# Altium PCB ball_dropper_rev2.PcbDoc (part 1 of 2)
Units mil, origin at the board's own origin, x right, y up, seen from the top; angles counter-clockwise.
Board outline 6000 x 4000 mil, 2 copper layers (Top Layer, Bottom Layer); 94 components, 89 nets, 479 pads, 374 vias.
Unrouted connection lines stored in the file: 4.
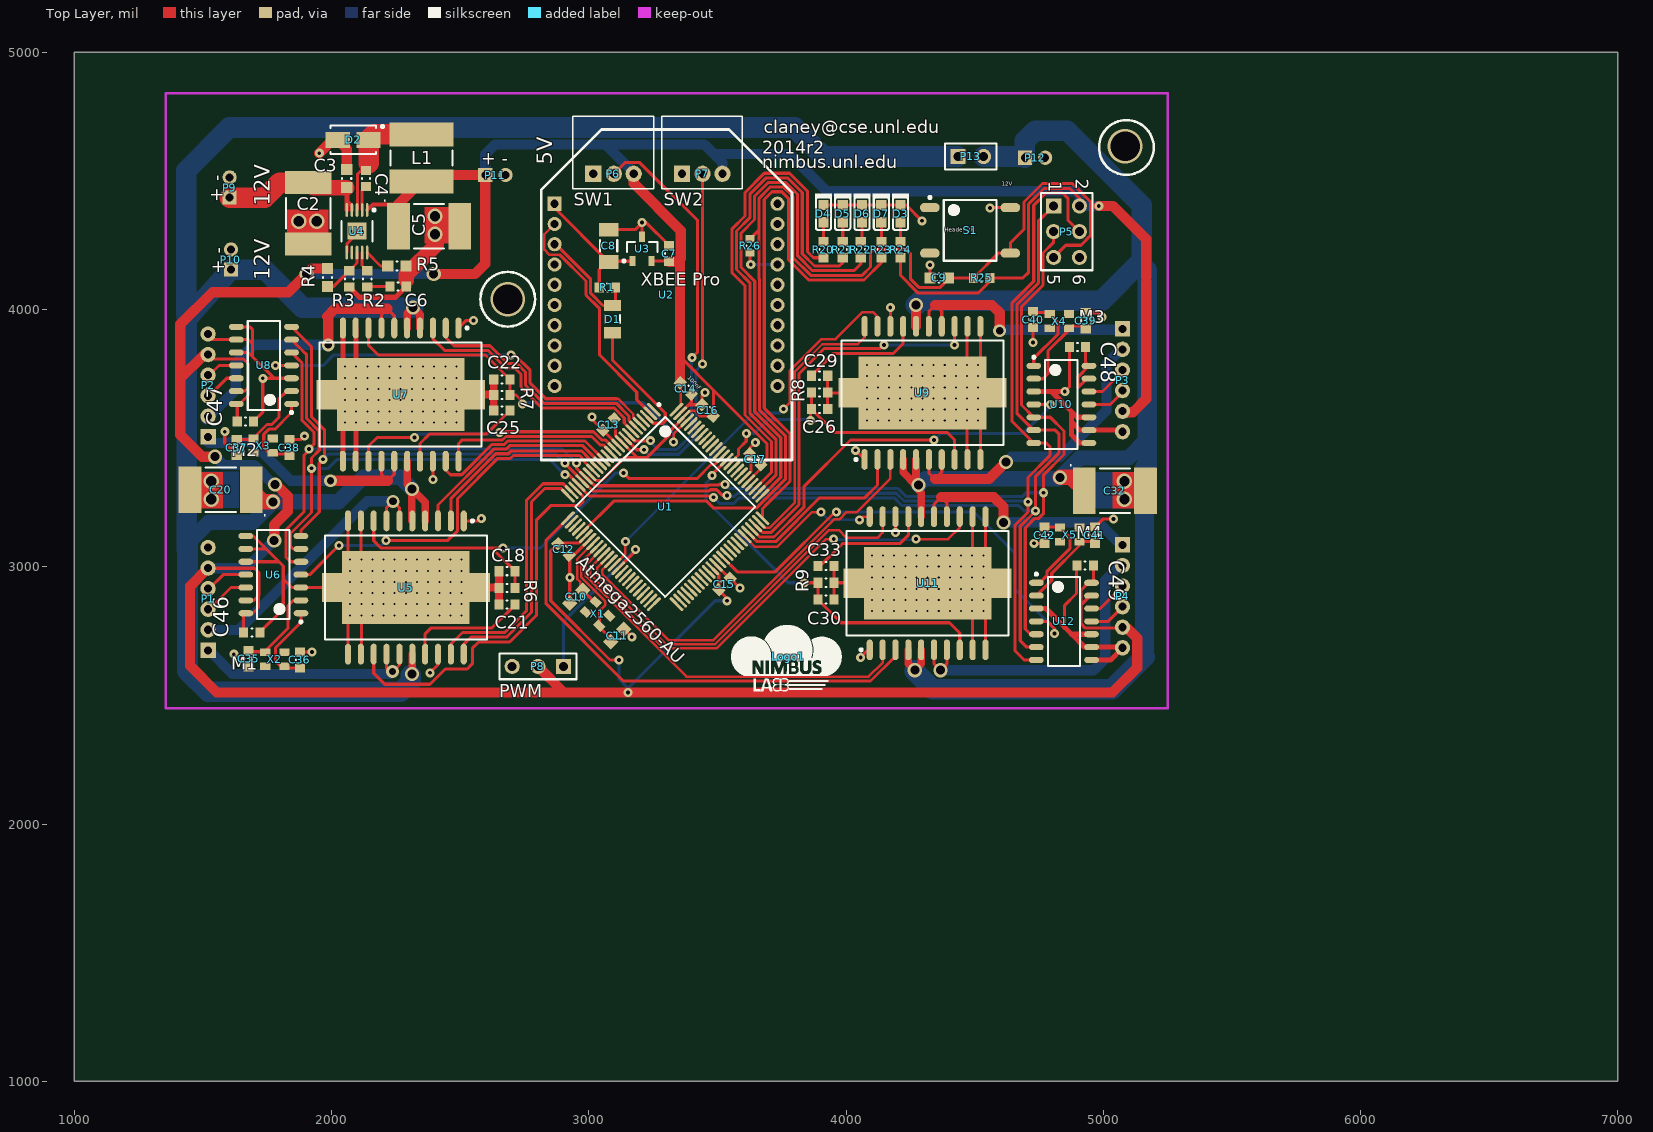
[diagram p0: Top Layer view]
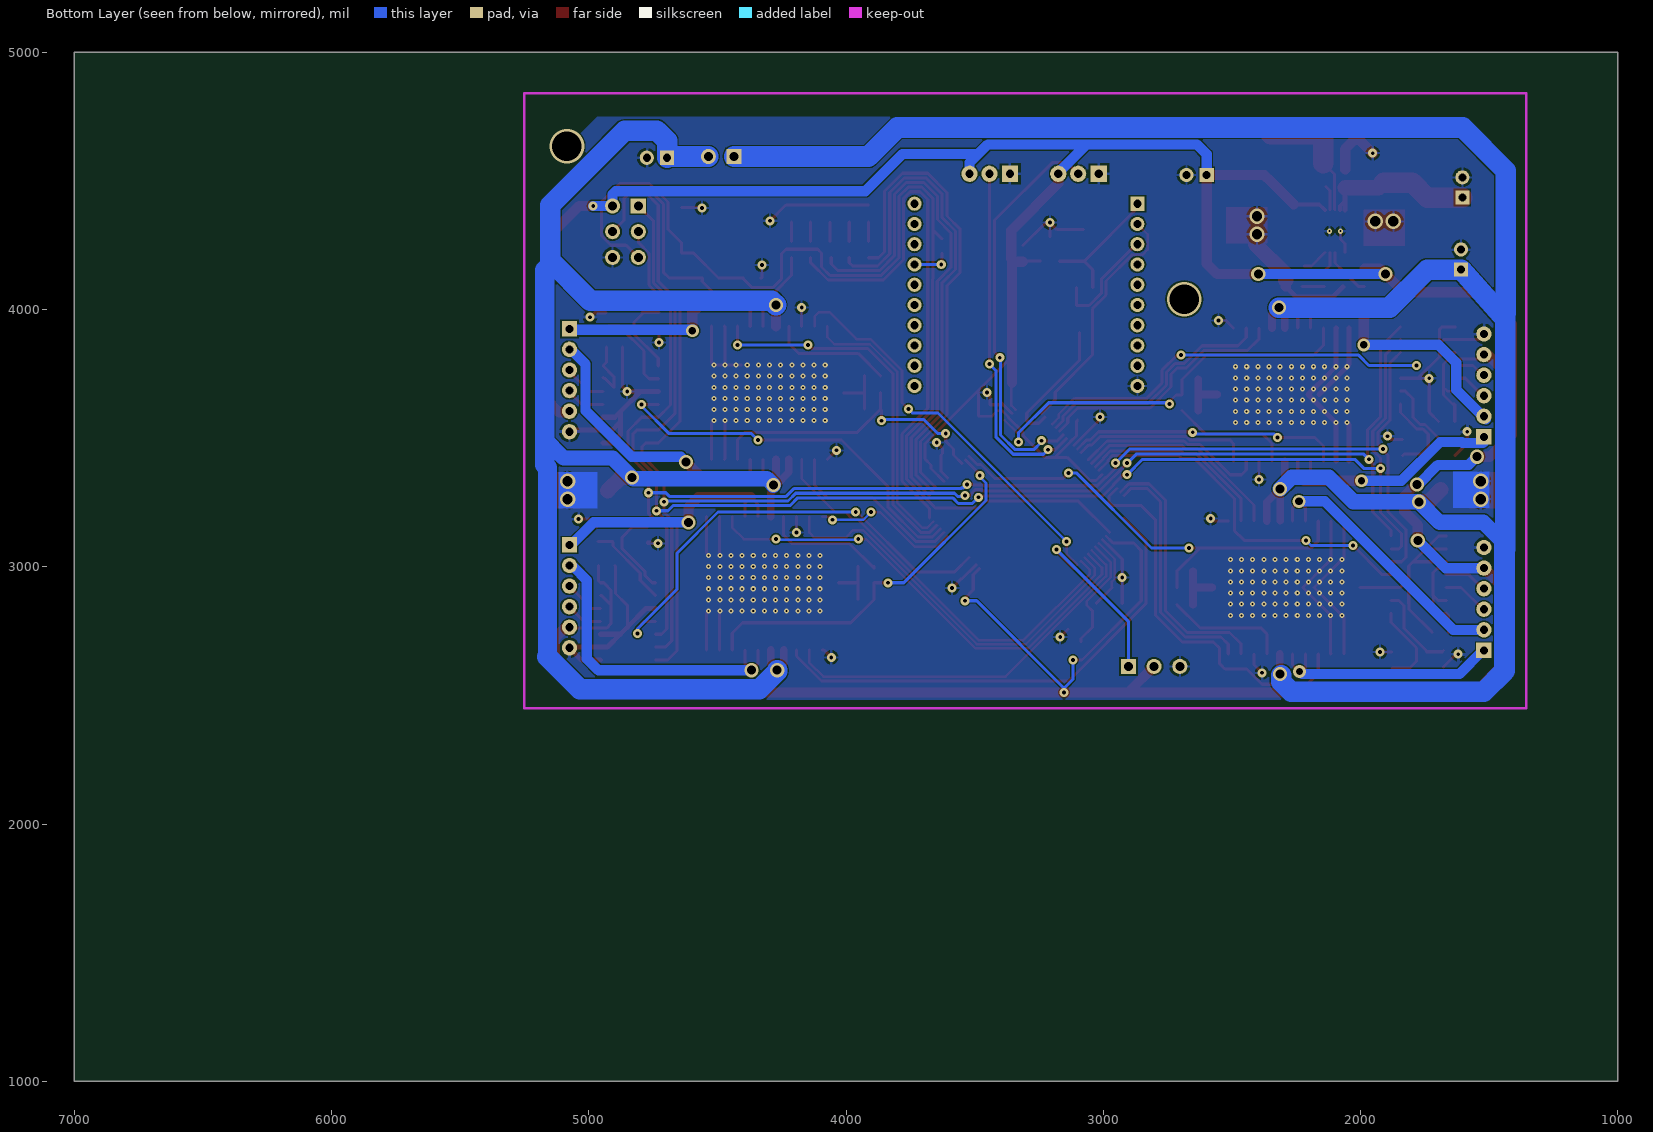
[diagram p1: Bottom Layer view, seen from below]

## Layer stack, top to bottom
Top Solder: solder mask 0.4, Solder Resist, Dk 3.5
Top Layer: signal copper 1.4
Dielectric 1: dielectric 12.6, FR-4, Dk 4.8
Bottom Layer: signal copper 1.4
Bottom Solder: solder mask 0.4, Solder Resist, Dk 3.5

## Board outline
1000,1000 7000,1000 7000,5000 1000,5000

## Design rules (kind name [scope] priority, off if disabled: settings)
Clearance Clearance_1 [All] p1: gap=6
PlaneConnect [All] p1: planeconnectstyle=Direct reliefexpansion=20 reliefentries=4 reliefconductorwidth=10 reliefairgap=10
PolygonConnect GNDConnect [InNet('GND') vs OnLayer('Top Layer')] p1: connectstyle=Direct reliefconductorwidth=10 reliefentries=4 polygonreliefangle="90 Angle" airgapwidth=10
PolygonConnect HBridgeConnect [(InComponent('U5') OR InComponent('U7') OR InComponent('U9') OR InComponent('U11'))] p2: connectstyle=Direct reliefconductorwidth=10 reliefentries=4 polygonreliefangle="90 Angle" airgapwidth=10
PolygonConnect PolygonConnect_1 [All] p3: connectstyle=Relief reliefconductorwidth=10 reliefentries=4 polygonreliefangle="90 Angle" airgapwidth=10
RoutingVias [All] p1: holewidth=15 width=35 viastyle="Through Hole" minholewidth=15 minwidth=35 maxholewidth=80 maxwidth=100
SolderMaskExpansion [All] p1: expansion=4
UnpouredPolygon [All] p1: allowunpoured=FALSE
Width [All] p1: maxlimit=100 minlimit=10 preferedwidth=12
28 further rules are at their usual default settings.

## Components (designator, comment, footprint, x,y, rotation, side; value= is the part's Value field where it differs from the comment)
C2 "100uF" TantalumCap7343 1908.96,4374.38 r270 top
C3 "10uF" CAPC0603(1608)100_M 2058.96,4509.38 r270 top
C4 "470nF" CAPC0603(1608)100_N 2133.96,4509.38 r90 top
C5 "47uF" TantalumCap7343 2378.96,4324.38 r0 top
C6 "470pF" CAPC0603(1608)100_N 2258.96,4089.38 r180 top
C7 "C470nF" CAPC0603(1608)100_N 3312.27,4217.73 r270 top
C8 "33uF" CAPC1206(3216)190_M 3077.27,4247.73 r270 top
C9 "10nF" CAPC0603(1608)100_M 4362.35,4122.73 r0 top
C10 "22pF" CAPC0603(1608)100_M 2951.21,2882.73 r45 top
C11 "22pF" CAPC0603(1608)100_M 3111.21,2732.73 r225 top
C12 "100nF" CAPC0603(1608)100_N 2902.27,3067.73 r135 top
C13 "100nF" CAPC0603(1608)100_N 3077.27,3552.73 r45 top
C14 "100nF" CAPC0603(1608)100_N 3377.27,3692.73 r135 top
C15 "100nF" CAPC0603(1608)100_N 3527.27,2932.73 r45 top
C16 "100nF" CAPC0603(1608)100_N 3462.27,3607.73 r315 top
C17 "100nF" CAPC0603(1608)100_N 3647.27,3417.73 r315 top
C18 "1uF" CAPC0603(1608)100_N 2682.27,2982.73 r0 top
C20 "47uF" TantalumCap7343 1568.96,3299.38 r180 top
C21 "33nF" CAPC0603(1608)100_N 2682.27,2852.73 r0 top
C22 "1uF" CAPC0603(1608)100_N 2662.27,3727.73 r0 top
C25 "33nF" CAPC0603(1608)100_N 2662.27,3607.73 r0 top
C26 "1uF" CAPC0603(1608)100_N 3897.35,3612.73 r180 top
C29 "33nF" CAPC0603(1608)100_N 3897.35,3742.73 r180 top
C30 "1uF" CAPC0603(1608)100_N 3922.27,2872.73 r180 top
C32 "47uF" TantalumCap7343 5045.58,3296.04 r0 top
C33 "33nF" CAPC0603(1608)100_N 3922.27,3002.73 r180 top
C35 "8.2pF" CAPC0603(1608)100_N 1677.27,2642.73 r270 top
C36 "8.2pF" CAPC0603(1608)100_N 1877.27,2637.73 r90 top
C37 "8.2pF" CAPC0603(1608)100_N 1631.5,3463.5 r270 top
C38 "8.2pF" CAPC0603(1608)100_N 1836.5,3463.5 r90 top
C39 "8.2pF" CAPC0603(1608)100_N 4932.27,3956.08 r90 top
C40 "8.2pF" CAPC0603(1608)100_N 4727.27,3961.08 r270 top
C41 "8.2pF" CAPC0603(1608)100_N 4967.35,3122.73 r90 top
C42 "8.2pF" CAPC0603(1608)100_N 4772.35,3122.73 r270 top
C46 "100nF" CAPC0603(1608)100_N 1690,2745 r180 top
C47 "100nF" CAPC0603(1608)100_N 1665,3565 r180 top
C48 "100nF" CAPC0603(1608)100_N 4900,3855 r0 top
C49 "100nF" CAPC0603(1608)100_N 4930,3005 r0 top
D1 "diode_MBRA210LT3G" C1206 3092.27,3962.73 r270 top
D2 "diode_B340A" diode_B340A 2083.96,4659.38 r0 top
D3 "APG1608SEKC/T" KING-LED0603-25-ORANGE_V 4212.27,4372.73 r270 top
D4 "APG1608SEKC/T" KING-LED0603-25-ORANGE_V 3912.27,4372.73 r270 top
D5 "APG1608SEKC/T" KING-LED0603-25-ORANGE_V 3987.27,4372.73 r270 top
D6 "APG1608SEKC/T" KING-LED0603-25-ORANGE_V 4062.27,4372.73 r270 top
D7 "APG1608SEKC/T" KING-LED0603-25-ORANGE_V 4137.27,4372.73 r270 top
L1 "6.3uH" TYS6045 2348.96,4589.38 r90 top
Logo1 "NimbusLogo" "NIMBUS Logo" 3775,2650 r0 top
P1 "M1" DF3A-6P-2DS 1520,2875 r90 top
P2 "M2" DF3A-6P-2DS 1520,3705 r90 top
P3 "M3" DF3A-6P-2DS 5075,3725 r270 top
P4 "M4" DF3A-6P-2DS 5075,2885 r270 top
P5 "ISP" HDR2X3 4807.35,4402.73 r270 top
P6 "SW1" DF3A-3P-2DS 3097.27,4527.73 r0 top
P7 "SW2" DF3A-3P-2DS 3442.27,4527.73 r0 top
P8 "PWM" HDR1X3 2902.27,2612.73 r180 top
P9 "12V" DF3A-2P-2DS 1603.96,4474.38 r90 top
P10 "12V" DF3A-2P-2DS 1608.96,4194.38 r90 top
P11 "5V" DF3A-2P-2DS 2637.27,4522.73 r0 top
P12 "12V" DF3A-2P-2DS 4735,4590 r0 top
P13 "Header 2H" HDR1X2 4435,4595 r0 top
R1 "10K" RESC0603(1608)_N 3072.27,4085.72 r180 top
R2 "16.2K" RESC0603(1608)_N 2138.96,4119.38 r90 top
R3 "100K" RESC0603(1608)_N 2068.96,4119.38 r90 top
R4 "536K" RESC0603(1608)_M 1983.96,4124.38 r90 top
R5 "40.2K" RESC0603(1608)_M 2253.96,4169.38 r0 top
R6 "100R" RESC0603(1608)_N 2682.27,2917.73 r0 top
R7 "100R" RESC0603(1608)_N 2662.27,3667.73 r0 top
R8 "100R" RESC0603(1608)_N 3897.35,3677.73 r180 top
R9 "100R" RESC0603(1608)_N 3922.27,2937.73 r180 top
R20 "330R" RESC0603(1608)_N 3912.35,4232.73 r90 top
R21 "330R" RESC0603(1608)_N 3987.35,4232.73 r90 top
R22 "330R" RESC0603(1608)_N 4057.27,4232.73 r90 top
R23 "330R" RESC0603(1608)_N 4137.35,4232.73 r90 top
R24 "330R" RESC0603(1608)_N 4212.35,4232.73 r90 top
R25 "4.7K" RESC0603(1608)_N 4527.35,4122.73 r0 top
R26 "Jumper 0603(1608)" RESC0603(1608)_L 3627.27,4247.73 r90 top
S1 "TactileSwitch" TactileSwitch 4482.35,4307.73 r0 top
U1 "Atmega2560-AU" TSQFP50P1600X1600X160-100N 3297.27,3232.73 r315 top
U2 "XBEE Pro" "XBEE PRO" 2867.27,3702.73 r0 top
U3 "LM3480" LM3480 3207.27,4235.72 r90 top
U4 "LT3480" LT-MSE-10-EDP_L 2098.96,4304.38 r270 top
U5 "MC33887" MC33887 2288.96,2919.38 r270 top
U6 "LFLS7366R-TS" TSOP127P600X135-14N 1773.96,2969.38 r180 top
U7 "MC33887" MC33887 2268.96,3669.38 r270 top
U8 "LFLS7366R-TS" TSOP127P600X135-14N 1737.27,3782.73 r180 top
U9 "MC33887" MC33887 4297.27,3676.08 r90 top
U10 "LFLS7366R-TS" TSOP127P600X135-14N 4837.27,3631.08 r0 top
U11 "MC33887" MC33887 4317.27,2936.08 r90 top
U12 "LFLS7366R-TS" TSOP127P600X135-14N 4847.35,2787.73 r0 top
X1 "20MHz" xtal4 2956.21,2827.73 r315 top
X2 "40MHz" xtal4 1717.27,2592.73 r0 top
X3 "40MHz" xtal4 1671.5,3423.5 r0 top
X4 "40MHz" xtal4 4892.27,4002.73 r180 top
X5 "40MHz" xtal4 4932.27,3172.73 r180 top

## Footprints (in the part's own frame and the unit in brackets; to place one, negate y for a bottom-side part, rotate by r counter-clockwise, add the part's x,y. Pads: shape width x height; smd on the part's side, far side on the other; paste and mask are expansions set on the pad)
C1206 [mm] "Chip Capacitor, Body 3.2x1.6mm, IPC High Density"
  rect 1.1x1.7 smd: 1(-1.35,0) 2(1.35,0)
  silkscreen extent -0.4,-0.75 0.4,0.75, body extent -1.7,-0.9 1.7,0.9, height 1.3
CAPC0603(1608)100_M [mm] "Chip Capacitor, Body 1.6x0.8mm, Height 1.0mm, IPC Low Density"
  rect 1.1x1.1 smd: 1(-0.9,0) 2(0.9,0)
  silkscreen extent -0.05,-0.45 0.05,0.45, body extent -0.87,-0.47 0.88,0.48, height 1
CAPC0603(1608)100_N [mm] "Chip Capacitor, Body 1.6x0.8mm, Height 1.0mm, IPC Medium Density"
  rect 0.9x1 smd: 1(-0.8,0) 2(0.8,0)
  silkscreen extent -0.05,-0.4 0.05,0.4, body extent -0.87,-0.48 0.88,0.47, height 1
CAPC1206(3216)190_M [mm] "Chip Capacitor, Body 3.2x1.6mm, Height 1.9mm, IPC Low Density"
  rect 1.35x1.9 smd: 1(-1.6,0) 2(1.6,0)
  silkscreen extent -0.55,-0.85 0.55,0.85, body extent -1.7,-0.9 1.7,0.9, height 1.9
DF3A-2P-2DS [mm] "Two terminal, Right Angle Connector"
  rect 1.4x1.4 hole 0.8: 1(-1,0)
  round 1.4 hole 0.8: 2(1,0)
  body extent -3.05,-1.5 3.05,5.7, height 5
DF3A-3P-2DS [mm]
  rect 1.6x1.6 hole 0.8: 1(-2.032,0)
  round 1.6 hole 0.8: 2(0,0) 3(1.968,0)
  silkscreen extent -4.03,-1.5 3.94,5.7
DF3A-6P-2DS [mil]
  rect 60x60 hole 31.5: 1(-200,0)
  round 60 hole 31.5: 2(-120,0) 3(-40,0) 4(40,0) 5(120,0) 6(200,0)
  body extent -275,-75 277,150, height 197
diode_B340A [mm] "Molded Diode, 2-Leads, Body 4.25x2.68mm, IPC Medium Density"
  rect 2.4x1.55 smd: 1(-1.525,0) 2(1.525,0)
  silkscreen extent -2.25,-1.4 3.03,1.45, body extent -2.25,-1.4 2.25,1.39, height 2.29
HDR1X2 [mm] "Connector; Header; 2 Position"
  rect 1.5x1.5 hole 0.9: 1(0,0)
  round 1.5 hole 0.9: 2(2.54,0)
  silkscreen extent -1.27,-1.27 3.81,1.27
HDR1X3 [mm] "Connector; Header; 3 Position"
  rect 1.5x1.5 hole 0.9: 1(0,0)
  round 1.5 hole 0.9: 2(2.54,0) 3(5.08,0)
  silkscreen extent -1.27,-1.27 6.35,1.27
HDR2X3 [mm] "Connector; Header; 3x2 Position"
  rect 1.5x1.5 hole 0.9: 1(0,0)
  round 1.5 hole 0.9: 2(0,2.54) 3(2.54,0) 4(2.54,2.54) 5(5.08,0) 6(5.08,2.54)
  silkscreen extent -1.27,-1.27 6.35,3.81
KING-LED0603-25-ORANGE_V [mm] "LED, SMT, Body 1.6 x 0.8 mm, 0.25mm Thickness"
  rect 1x1 smd paste+0 mask+0: 1(0.85,0) 2(-0.85,0)
  silkscreen extent -1.97,-0.85 1.6,0.85, body extent -0.8,-0.4 0.8,0.4, height 0.25
LM3480 [mm] "SOT23, 3-Leads, Body 2.92x2.37mm, Pitch 0.95mm, IPC Medium Density"
  rect 1x0.6 smd: 1(-1.2,0.95) 2(-1.2,-0.95) 3(1.2,0)
  silkscreen extent -1.32,-1.5 0.7,1.92, body extent -0.7,-1.52 0.7,1.52, height 1.12
LT-MSE-10-EDP_L [mm] "SOP, 10-Leads, Body 3.1x3.1mm, Pitch 0.5mm, Thermal Pad 1.88x1.68mm, IPC High Density"
  oval 1.35x0.25 smd mask+0.082: 1(-2.1,1) 2(-2.1,0.5) 3(-2.1,0) 4(-2.1,-0.5) 5(-2.1,-1) 6(2.1,-1) 7(2.1,-0.5) 8(2.1,0) 9(2.1,0.5) 10(2.1,1)
  rect 1.68x1.88 smd mask+0.082: 11(0,0)
  silkscreen extent -2.22,-1.55 1.02,1.8, body extent -1.55,-1.55 1.55,1.55, height 1.1
MC33887 [mm] "SOP, 20-Leads, Body 15.90x11.00mm, Pitch 1.27mm, Thermal Pad 12.60x7.20mm, IPC Medium Density"
  oval 2.05x0.6 smd: 1(-6.575,5.715) 2(-6.575,4.445) 3(-6.575,3.175) 4(-6.575,1.905) 5(-6.575,0.635) 6(-6.575,-0.635) 7(-6.575,-1.905) 8(-6.575,-3.175) 9(-6.575,-4.445) 10(-6.575,-5.715) 11(6.575,-5.715) 12(6.575,-4.445) 13(6.575,-3.175) 14(6.575,-1.905) 15(6.575,-0.635) 16(6.575,0.635) 17(6.575,1.905) 18(6.575,3.175) 19(6.575,4.445) 20(6.575,5.715)
  rect 2.9x2 smd: 21(0,7.3) 21(0,-7.3)
  rect 7.2x12.6 smd: 21(0,0)
  silkscreen extent -6.7,-8 5.15,8, body extent -5.55,-8 5.55,8, height 3.4
"NIMBUS Logo" [mil] "NIMBUS Logo Silkscreen"
  silkscreen extent -222,-134 208,123
RESC0603(1608)_L [mm] "Chip Resistor, Body 1.6x0.8mm, IPC High Density"
  rect 0.7x0.9 smd: 1(-0.7,0) 2(0.7,0)
  silkscreen extent -0.05,-0.35 0.05,0.35, body extent -0.85,-0.47 0.85,0.47, height 0.6
RESC0603(1608)_M [mm] "Chip Resistor, Body 1.6x0.8mm, IPC Low Density"
  rect 1.1x1.1 smd: 1(-0.9,0) 2(0.9,0)
  silkscreen extent -0.05,-0.45 0.05,0.45, body extent -0.85,-0.47 0.85,0.47, height 0.6
RESC0603(1608)_N [mm] "Chip Resistor, Body 1.6x0.8mm, IPC Medium Density"
  rect 0.9x1 smd: 1(-0.8,0) 2(0.8,0)
  silkscreen extent -0.05,-0.4 0.05,0.4, body extent -0.85,-0.47 0.85,0.47, height 0.6
TactileSwitch [mm] "SOP, 4-Leads, Body 6.00x6.00mm, Pitch 4.50mm, IPC Medium Density"
  oval 1.95x0.9 smd: 1(-3.975,2.25) 2(-3.975,-2.25) 3(3.975,-2.25) 4(3.975,2.25)
  silkscreen extent -4.1,-3 2.6,3.37, body extent -3,-3 3,3, height 4.4
TantalumCap7343 [mm]
  rect 2.25x4.6 smd: 1(-3.025,0) 2(3.025,0)
  silkscreen extent -4.41,-2.2 1.5,2.56, body extent -3.8,-2.3 3.8,2.3, height 1.5
TSOP127P600X135-14N [mm] "TSOP, 14-Leads, Body 8.65x3.90mm, Pitch 1.27mm, IPC Medium Density"
  oval 1.45x0.6 smd: 1(-2.725,3.81) 2(-2.725,2.54) 3(-2.725,1.27) 4(-2.725,0) 5(-2.725,-1.27) 6(-2.725,-2.54) 7(-2.725,-3.81) 8(2.725,-3.81) 9(2.725,-2.54) 10(2.725,-1.27) 11(2.725,0) 12(2.725,1.27) 13(2.725,2.54) 14(2.725,3.81)
  silkscreen extent -2.85,-4.4 1.6,4.78, body extent -2,-4.4 2,4.4, height 1.75
TSQFP50P1600X1600X160-100N [mm] "TSQFP, 100-Leads, Body 14.00x14.00mm, Pitch 0.50mm, IPC Medium Density"
  oval 1.8x0.3 smd: 1(-7.575,6) 2(-7.575,5.5) 3(-7.575,5) 4(-7.575,4.5) 5(-7.575,4) 6(-7.575,3.5) 7(-7.575,3) 8(-7.575,2.5) 9(-7.575,2) 10(-7.575,1.5) 11(-7.575,1) 12(-7.575,0.5) 13(-7.575,0) 14(-7.575,-0.5) 15(-7.575,-1) 16(-7.575,-1.5) 17(-7.575,-2) 18(-7.575,-2.5) 19(-7.575,-3) 20(-7.575,-3.5) 21(-7.575,-4) 22(-7.575,-4.5) 23(-7.575,-5) 24(-7.575,-5.5) 25(-7.575,-6) 51(7.575,-6) 52(7.575,-5.5) 53(7.575,-5) 54(7.575,-4.5) 55(7.575,-4) 56(7.575,-3.5) 57(7.575,-3) 58(7.575,-2.5) 59(7.575,-2) 60(7.575,-1.5) 61(7.575,-1) 62(7.575,-0.5) 63(7.575,0) 64(7.575,0.5) 65(7.575,1) 66(7.575,1.5) 67(7.575,2) 68(7.575,2.5) 69(7.575,3) 70(7.575,3.5) 71(7.575,4) 72(7.575,4.5) 73(7.575,5) 74(7.575,5.5) 75(7.575,6)
  oval 0.3x1.8 smd: 26(-6,-7.575) 27(-5.5,-7.575) 28(-5,-7.575) 29(-4.5,-7.575) 30(-4,-7.575) 31(-3.5,-7.575) 32(-3,-7.575) 33(-2.5,-7.575) 34(-2,-7.575) 35(-1.5,-7.575) 36(-1,-7.575) 37(-0.5,-7.575) 38(0,-7.575) 39(0.5,-7.575) 40(1,-7.575) 41(1.5,-7.575) 42(2,-7.575) 43(2.5,-7.575) 44(3,-7.575) 45(3.5,-7.575) 46(4,-7.575) 47(4.5,-7.575) 48(5,-7.575) 49(5.5,-7.575) 50(6,-7.575) 76(6,7.575) 77(5.5,7.575) 78(5,7.575) 79(4.5,7.575) 80(4,7.575) 81(3.5,7.575) 82(3,7.575) 83(2.5,7.575) 84(2,7.575) 85(1.5,7.575) 86(1,7.575) 87(0.5,7.575) 88(0,7.575) 89(-0.5,7.575) 90(-1,7.575) 91(-1.5,7.575) 92(-2,7.575) 93(-2.5,7.575) 94(-3,7.575) 95(-3.5,7.575) 96(-4,7.575) 97(-4.5,7.575) 98(-5,7.575) 99(-5.5,7.575) 100(-6,7.575)
  silkscreen extent -7.7,-6.28 6.28,6.82, body extent -7,-7 7,7, height 1.6
TYS6045 [mm] "Chip Inductor, 2-Leads, Body 6.00x6.00mm, IPC Medium Density"
  rect 2.36x6.32 smd: 1(-2.32,0) 2(2.32,0)
  silkscreen extent -0.75,-3.06 0.75,3.06, body extent -3.15,-3.15 3.15,3.15, height 4.5
"XBEE PRO" [mm] "XBEE PRO"
  rect 1.4x1.4 hole 0.8: 1(0,18)
  round 1.4 hole 0.8: 2(0,16) 3(0,14) 4(0,12) 5(0,10) 6(0,8) 7(0,6) 8(0,4) 9(0,2) 10(0,0) 11(22,0) 12(22,2) 13(22,4) 14(22,6) 15(22,8) 16(22,10) 17(22,12) 18(22,14) 19(22,16) 20(22,18)
  body extent -1.19,-7.37 23.19,25.61, height 7
xtal4 [mm]
  rect 1x0.75 smd: 1(0.635,1.905) 2(2.54,0.508) 3(0.635,0.508) 4(2.54,1.905)
  Mechanical 1 keep-out lines w0.254: 0.127,0 0,0.127 0,2.413 3.048,2.413 3.175,2.286 3.175,0.127 3.048,0 0.127,0
  body extent 0.25,0.25 2.92,2.16, height 0.55

## Part data
C2 C5 C20 C32: library part TantalumCap7343
C3: library part CMP-1035-02800-1, "CAP 10uF 10V ±20% 0603 (1608 Metric) Thickness 1mm SMD"
C4: library part CMP-1035-02701-1, "CAP 470nF 16V ±20% 0603 (1608 Metric) Thickness 1mm SMD"
C6: library part CMP-1035-01664-1, "CAP 470pF 16V ±2% 0603 (1608 Metric) Thickness 1mm SMD"
C7: library part CMP-1035-02696-1, "CAP 470nF 10V ±10% 0603 (1608 Metric) Thickness 1mm SMD"
C8: library part CMP-1037-04997-1, "CAP 33uF 10V ±20% 1206 (3216 Metric) Thickness 1.9mm SMD"
C9: library part CMP-1035-02304-1, "CAP 10nF 10V ±2% 0603 (1608 Metric) Thickness 1mm SMD"
C10 C11: library part CMP-1035-00797-1, "CAP 22pF 10V ±0.25pF 0603 (1608 Metric) Thickness 1mm SMD"
C12 C13 C14 C15 C16 C17 C46 C47 C48 C49: library part CMP-1035-02582-1, "CAP 100nF 10V -20% to +80% 0603 (1608 Metric) Thickness 1mm SMD"
C18 C22 C26 C30: library part CMP-1035-02740-1, "CAP 1uF 25V ±10% 0603 (1608 Metric) Thickness 1mm SMD"
C21 C25 C29 C33: library part CMP-1035-02463-1, "CAP 33nF 25V ±5% 0603 (1608 Metric) Thickness 1mm SMD"
C35 C36 C37 C38 C39 C40 C41 C42: library part CMP-1035-00477-1, "CAP 8.2pF 10V ±0.1pF 0603 (1608 Metric) Thickness 1mm SMD"
D3 D4 D5 D6 D7: library part CMP-0239-00002-1, "LED, SMT, 0603(1608), 0.25mm Tthickness, Super Bright Orange"
L1: library part Inductor, "Inductor"
P1 P2 P3 P4: library part "Header 6", "Header, 6-Pin"
P5: library part "Header 3X2", "Header, 3-Pin, Dual row"
P6 P7: library part Hirose3
P8: library part "Header 3", "Header, 3-Pin"
P9 P10 P11 P12: library part "Header 2", "Header, 2-Pin"
P13: "Header, 2-Pin, Right Angle"
R1: library part CMP-1012-00098-1, "10K 0.1W 5% 0603 (1608 Metric)  SMD"
R2: library part CMP-1012-00645-1, "16K2 0.1W 1% 0603 (1608 Metric)  SMD"
R3: library part CMP-1012-00122-1, "100K 0.1W 5% 0603 (1608 Metric)  SMD"
R4: library part CMP-1012-00819-1, "536K 0.1W 1% 0603 (1608 Metric)  SMD"
R5: library part CMP-1012-00691-1, "40K2 0.1W 1% 0603 (1608 Metric)  SMD"
R6 R7 R8 R9: library part CMP-1012-00050-1, "100R 0.1W 5% 0603 (1608 Metric)  SMD"
R20 R21 R22 R23 R24: library part CMP-1012-00062-1, "330R 0.1W 5% 0603 (1608 Metric)  SMD"
R25: library part CMP-1012-00090-1, "4K7 0.1W 5% 0603 (1608 Metric)  SMD"
R26: library part CMP-1012-00001-1, "Jumper 0603 (1608 Metric)"
U1: "ATMEGA2560-16AURCT-ND"
U2: library part "Xbee Pro", "XBEE/XBEE Pro"
U3: "LM3480IM3-3.3/NOPBCT-ND"
U4: library part CMP-0491-01005-1, "2 A, 2.4 MHz Step-Down Switching Regulator with 70 uA Quiescent Current, 10-pin SOP (MSE-10-EDP), -40 to 85 degC, Pb-Free, Tape and Reel"
U5 U7 U9 U11: library part "33887 H Bridge", "MC33887APVWR2CT-ND"
X1 X2 X3 X4 X5: library part xtal4

## Via types
v1: diameter 19.68, hole 7.87, Top Layer to Bottom Layer, 266 vias
v2: diameter 35, hole 15, Top Layer to Bottom Layer, 70 vias
v3: diameter 55, hole 35, Top Layer to Bottom Layer, 13 vias
v4: diameter 60, hole 40, Top Layer to Bottom Layer, 8 vias
v5: diameter 35, hole 15, Top Layer to Bottom Layer, tented both sides, 7 vias
v6: diameter 50, hole 28, Top Layer to Bottom Layer, 4 vias
v7: diameter 55, hole 35, Top Layer to Bottom Layer, tented both sides, 3 vias
v8: diameter 135, hole 115, Top Layer to Bottom Layer, 2 vias
v9: diameter 50, hole 30, Top Layer to Bottom Layer, 1 vias

## Nets (pads, with @x,y where several pads share a name; then routed paths per layer and width w, separated by ;. In a path a pad name is that pad's centre, name@x,y a point inside that pad or via, vN(x,y) a via of type N, cw(c..) or ccw(c..) an arc to the next point about the centre after c; other vN are vias at no path point)
3.3V: C8.2 R1.2 U2.1 U3.1 | length 520.1
  Top Layer w12: U2.1@2867.27,4411.39 2867.27,4394.74 C8.2@3074.28,4187.73 ; R1.2@3040.78,4085.72 3040.78,4154.23 C8.2@3074.28,4187.73 ; U3.1@3169.12,4187.73 C8.2@3074.28,4187.73
5V: C5.1 C7.2 C12.2 C13.2 C14.2 C15.1 C16.2 C17.2 C46.2 C47.2 C48.2 C49.2 L1.1 P1.5 P2.5 P3.5 P4.5 P5.2 P6.3 P7.3 P8.2 P11.1 R4.2 R24.1 R25.2 U1.10 U1.19 U1.31 U1.61 U1.80 U1.98 U1.100 U3.2 U4.1 U6.13 U6.14 U8.13 U8.14 U10.13 U10.14 U12.13 U12.14 | length 19296.3
  Top Layer w10: P2.5@1502.5,3822.5 1520,3822.5 1534.77,3807.73 1657.27,3807.73 1677.27,3787.73 1677.27,3697.73 ; U8.13@1629.99,3682.73 1662.27,3682.73 1677.27,3697.73 ; U8.14@1636.13,3632.73 1642.27,3632.73 1677.27,3667.73 1677.27,3697.73 ; U6.14@1666.68,2819.38 1693.92,2819.38 1717.27,2842.73 1717.27,2887.73 ; U1.100@3341.12,3610.64 3357.27,3626.8 3357.27,3712.73 C14.2@3355,3715 ; U1.98@3368.96,3582.8 3392.82,3606.67 3410.76,3606.67 3431.97,3585.46 C16.2@3484.54,3585.46
  Top Layer w12: P1.5@1519.38,2994.38 1700.62,2994.38 1717.27,2977.73 1717.27,2887.73 1698.92,2869.38 U6.13@1666.68,2869.38 ; C47.2@1633.5,3565 1633.5,3630.1 U8.14@1636.13,3632.73 ; C46.2@1658.5,2745 1658.5,2811.21 U6.14@1666.68,2819.38 ; U1.31@2988.96,3119.29 2962.4,3092.73 2882.27,3092.73 2852.27,3062.73 2852.27,2867.73 3082.27,2637.73 v2(3117.27,2637.73) ; U1.19@3005.19,3357.91 3027.87,3335.23 3050.23,3335.23 3140.5,3425.5 3187.78,3425.5 ; C13.2@3099.54,3570 3103.28,3566.26 3103.28,3510.23 U1.10@3128.15,3485.37 3128.15,3485.13 3187.78,3425.5 ; U3.2@3244.67,4188.48 C7.2@3326.52,4188.48 ; 3355,3812.73 3358.99,3812.73 3484.54,3687.18 ; U1.98@3368.96,3580.29 3313,3524.33 3313,3511.28 3227.22,3425.5 3187.78,3425.5 ; U1.61@3480.31,2994.01 3505.18,2969.15 3505.18,2910.63 C15.1@3505,2910.46 3537.27,2878.19 v2(3537.27,2867.73) ; C16.2@3484.54,3585.46 3484.54,3687.18 ; U1.80@3619.51,3332.25 3669.54,3382.29 C17.2@3669.54,3395.46 3692.27,3418.19 3692.27,3479.45 3484.54,3687.18 ; R24.1@4212.35,4201.23 4212.35,4132.19 4279.54,4065 4515,4065 4558.85,4108.85 R25.2@4558.85,4122.73 4687.73,4122.73 4710,4145 4710,4410.83 ; 4711.89,4412.73 4769.89,4470.73 4870.27,4470.73 4907.35,4433.65 P5.2@4907.35,4402.73 ; 4914.09,2852.73 4949.09,2887.73 U12.13@4954.63,2887.73 ; C48.2@4931.5,3855 4931.5,3794.13 U10.14@4944.55,3781.08 4902.27,3738.79 4902.27,3697.73 4935.62,3731.08 4942.42,3734.88 U10.13@4944.55,3736.08 ; C49.2@4961.5,3005 4961.5,2944.59 U12.14@4954.63,2937.73 4942.27,2937.73 4914.09,2909.55 4914.09,2777.87 4930.42,2761.54 5071.81,2761.54 P4.5@5072.27,2761.08 ; P3.5@5073.46,3604.89 P3.5@5077.27,3601.08 ; 5167.27,4107.27 5167.27,4125
  Top Layer w15: U4.1@2138.33,4387.06 2160.22,4408.95 C5.1@2259.87,4408.95
  Top Layer w40: 1412.27,3732.27 P2.5@1502.5,3822.5 ; P1.5@1519.38,2994.38 1450,2925 1450,2615 1553.77,2511.23 2903.77,2511.23 ; v3(1547.27,3427.73) 1497.27,3427.73 1412.27,3512.73 1412.27,3942.73 1537.27,4067.73 1832.27,4067.73 v7(1902.27,4137.73) 1924.36,4159.82 R4.2@1983.96,4159.82 ; v3(1777.27,3102.73) 1777.27,3162.73 1830,3215.46 1830,3274.2 1784.2,3320 v3(1780,3320) ; C5.1@2259.87,4408.95 L1.1@2348.96,4498.04 2373.65,4522.73 P11.1@2597.9,4522.73 2597.9,4178.36 2557.27,4137.73 v7(2397.27,4137.73) ; P8.2@2802.27,2612.73 2903.77,2511.23 ; P6.3@3174.75,4527.73 3174.75,4490.25 3357.96,4307.04 3357.96,4198.41 3355,4195.46 ; C7.2@3312.27,4186.23 3345.78,4186.23 3355,4195.46 ; C14.2@3355,3715 3355,3812.73 3355,4195.46 ; v2(4982.73,4402.73) 5037.27,4402.73 5167.27,4272.73 5167.27,4125 ; P4.5@5072.27,2761.08 5093.92,2761.08 5132.27,2722.73 5132.27,2607.73 5035.77,2511.23 v2(3152.27,2511.23) 2903.77,2511.23 ; P3.5@5077.27,3601.08 5115.62,3601.08 5167.27,3652.73 5167.27,4107.27
  Bottom Layer w12: v2(3117.27,2637.73) 3117.27,2562.73 3152.27,2527.73 3492.27,2867.73 v2(3537.27,2867.73)
  Bottom Layer w40: P1.5@1523.96,2994.38 1668.92,2994.38 v3(1777.27,3102.73) ; v3(1547.27,3427.73) 1579,3396 1698.95,3396 1780,3314.95 v3(1780,3320) ; v7(1902.27,4137.73) v7(2397.27,4137.73) ; P11.1@2597.9,4522.73 2597.9,4603.36 2636.27,4641.73 3064.58,4641.73 ; P6.3@3174.75,4531.56 3064.58,4641.73 ; P7.3@3519.75,4527.73 3519.75,4570.25 3448.27,4641.73 ; v2(4982.73,4402.73) P5.2@4907.35,4402.73 4907.35,4447.65 4895,4460 3925,4460 3780,4605 3485,4605 3448.27,4641.73 ; 3064.58,4641.73 3448.27,4641.73